# Altium PCB 8relay_breakout.PcbDoc
Units mm, origin at the board's own origin, x right, y up, seen from the top; angles counter-clockwise.
Board outline 91 x 31 mm, 2 copper layers (Top Layer, Bottom Layer); 14 components, 13 nets, 29 pads, 0 vias.
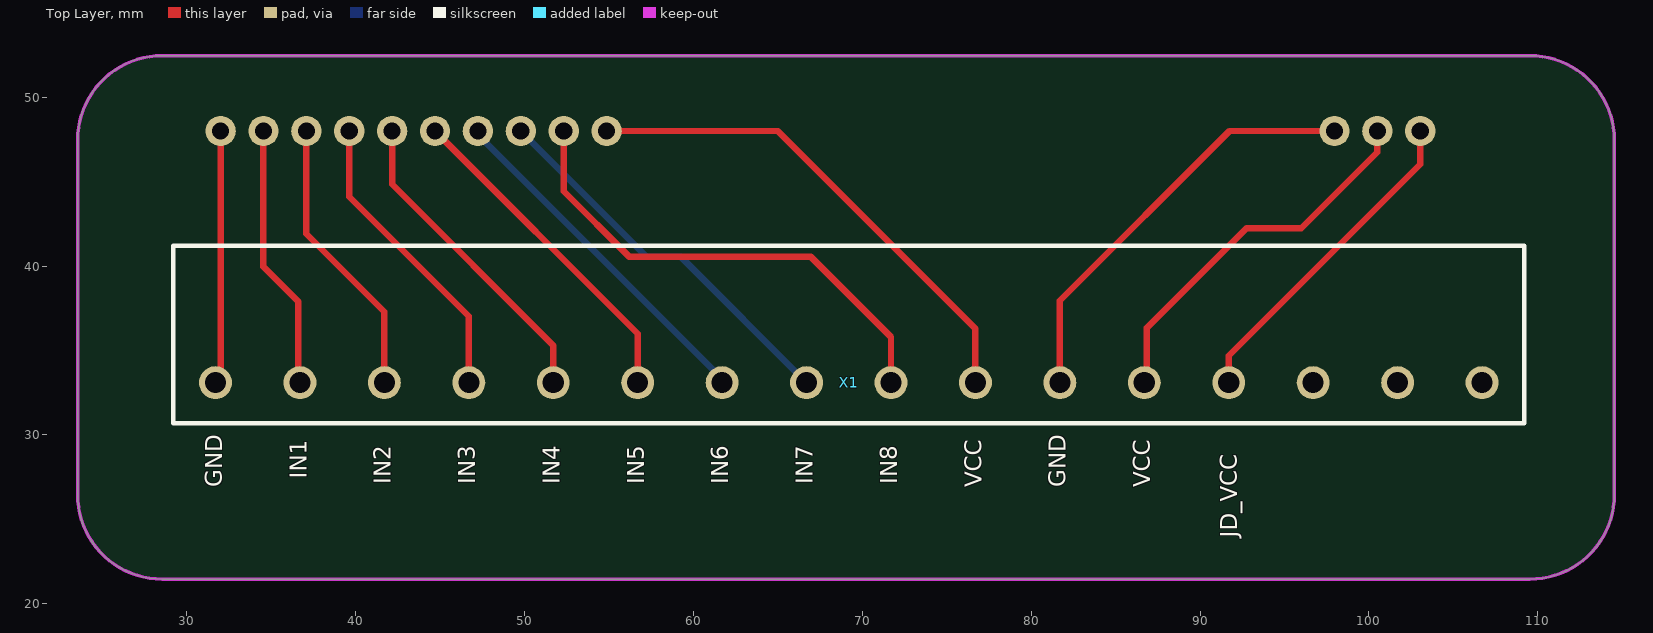
[diagram p0: Top Layer view]
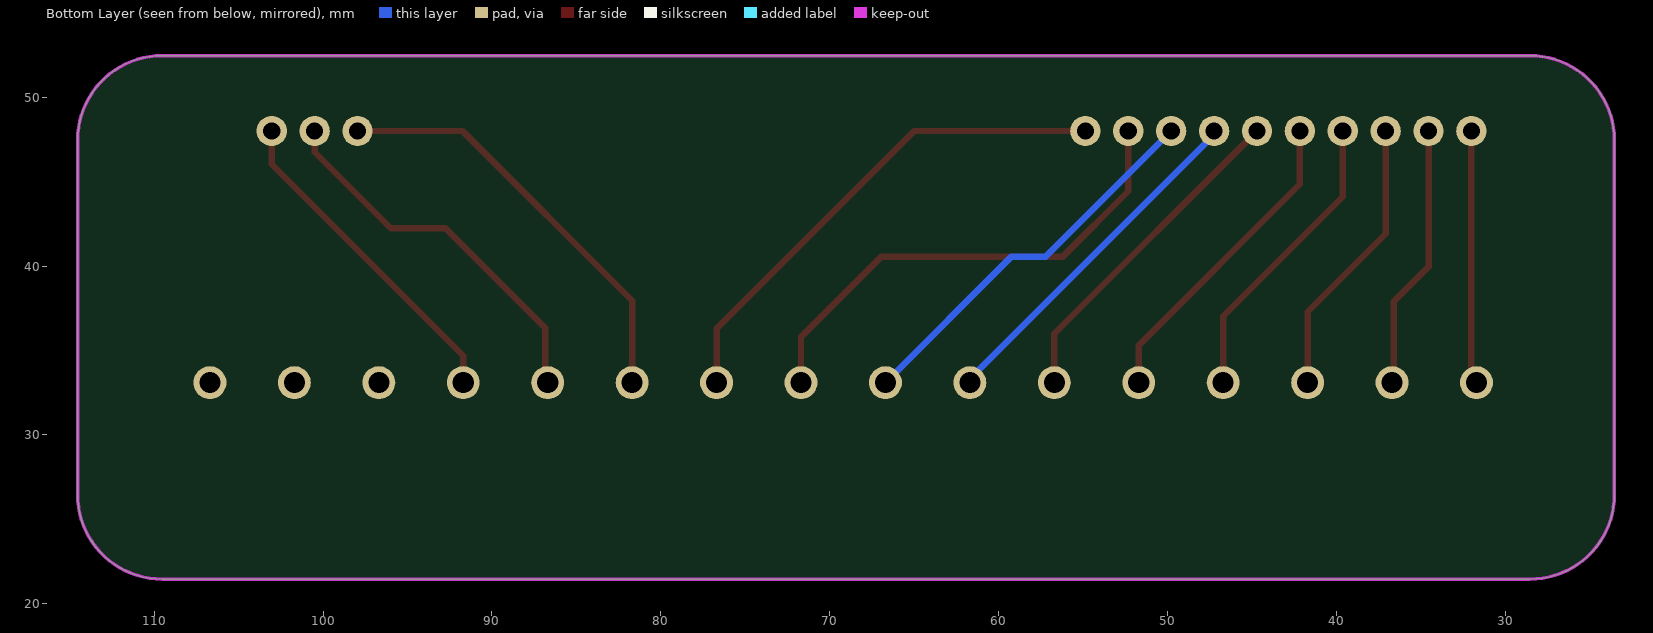
[diagram p1: Bottom Layer view, seen from below]

## Layer stack, top to bottom
Top Solder: solder mask 0.0102, Solder Resist, Dk 3.5
Top Layer: signal copper 0.0356
Dielectric 1: dielectric 0.32, FR-4, Dk 4.8
Bottom Layer: signal copper 0.0356
Bottom Solder: solder mask 0.0102, Solder Resist, Dk 3.5

## Board outline
23.536,47.464 23.536,26.464 ccw(c28.536,26.464) 28.536,21.464 109.536,21.464 ccw(c109.536,26.464) 114.536,26.464 114.536,47.464 ccw(c109.536,47.464) 109.536,52.464 28.536,52.464 ccw(c28.536,47.464)

## Design rules (kind name [scope] priority, off if disabled: settings)
BoardOutlineClearance [All] p1: gap=0.3 ignorepadtopadclearanceinfootprint=FALSE except(0.4: Arc-SplitBarrior Arc-SplitContinuation Track-SplitBarrior Track-SplitContinuation SMDPad-SplitBarrior SMDPad-SplitContinuation THPad-SplitBarrior THPad-SplitContinuation Via-SplitBarrior Via-SplitContinuation Fill-SplitBarrior Fill-SplitContinuation Poly-SplitBarrior Poly-SplitContinuation Region-SplitBarrior Region-SplitContinuation Text-SplitBarrior Text-SplitContinuation)
Clearance "Clearance Different Nets" [All] p1: gap=0.2 ignorepadtopadclearanceinfootprint=FALSE except(0.089: Arc-Arc Arc-Track Arc-SMDPad Track-Track Track-SMDPad; 0.127: SMDPad-SMDPad SMDPad-Via THPad-Via Via-Via; 0.254: Arc-Via Arc-Text Track-Via Track-Text SMDPad-Text THPad-Text Via-Text Fill-Text Poly-Text Region-Text Text-Text; 0.5: THPad-THPad Via-Hole)
Clearance "Clearance Same Nets" [All] p2: gap=0.2 ignorepadtopadclearanceinfootprint=FALSE except(0.089: Arc-Arc Arc-Track Arc-SMDPad Track-Track Track-SMDPad SMDPad-SMDPad; 0.127: SMDPad-Via THPad-Via; 0.254: Arc-Via Arc-Text Track-Via Track-Text SMDPad-Text THPad-Text Via-Via Via-Text Fill-Text Poly-Text Region-Text Text-Text)
Clearance "Clearance Bottom Layer" [OnLayer('Bottom Layer')] p3: gap=0.203 ignorepadtopadclearanceinfootprint=TRUE except(0.254: Arc-Text Track-Text SMDPad-Text THPad-Text Via-Text Fill-Text Poly-Text Region-Text Text-Text)
Clearance "Clearance Top Layer" [OnLayer('Top Layer')] p4: gap=0.203 ignorepadtopadclearanceinfootprint=TRUE except(0.254: Arc-Text Track-Text SMDPad-Text THPad-Text Via-Text Fill-Text Poly-Text Region-Text Text-Text)
HoleSize [All] p1: absolutevalues=TRUE maxlimit=6.3 minlimit=0.2 maxpercent=80.000 minpercent=20.000
MinimumAnnularRing [All] p1: minimumring=0.13
MinimumSolderMaskSliver [All] p1: minsoldermaskwidth=0.1
PolygonConnect PolygonConnect_1 [All] p1: thpad.connectstyle=Relief thpad.reliefconductorwidth=0.508 thpad.reliefentries=4 thpad.polygonreliefangle="90 Angle" thpad.airgapwidth=0.254 smdpad.connectstyle=Relief smdpad.reliefconductorwidth=0.508 smdpad.reliefentries=4 smdpad.polygonreliefangle="90 Angle" smdpad.airgapwidth=0.254 via.connectstyle=Direct via.reliefconductorwidth=0.508 via.reliefentries=4 via.polygonreliefangle="90 Angle" via.airgapwidth=0.254
RoutingCorners [All] p1: cornerstyle=Round minsetback=2.54 maxsetback=2.54
RoutingVias [All] p1: holewidth=0.5 width=1 viastyle="Through Hole" minholewidth=0.2 minwidth=0.35 maxholewidth=1 maxwidth=2
SilkToSilkClearance [All] p1: silktosilkclearance=0.1
SilkToSolderMaskClearance [IsPad] p1: minsilkscreentomaskgap=0.1 clearancetoexposedcopper=TRUE
SolderMaskExpansion [All] p1: expansion=0.102 istentingtop=FALSE
Width [All] p1: maxlimit=2.54 minlimit=0.089 preferedwidth=0.381
25 further rules are at their usual default settings.

## Classes and differential pairs
component class 8relay_breakout: GND IN1 IN2 IN3 IN4 IN5 IN6 IN7 IN8 JD_VCC VCC X1

## Components (designator, comment, footprint, x,y, rotation, side; value= is the part's Value field where it differs from the comment)
GND "GenericPinHeader(0.1in)" GenericPinHeader(.1in) 32,48 r0 top (schematic designator X4)
GND "GenericPinHeader(0.1in)" GenericPinHeader(.1in) 97.96,48 r0 top (schematic designator X2)
IN1 "GenericPinHeader(0.1in)" GenericPinHeader(.1in) 34.54,48 r0 top (schematic designator X5)
IN2 "GenericPinHeader(0.1in)" GenericPinHeader(.1in) 37.08,48 r0 top (schematic designator X6)
IN3 "GenericPinHeader(0.1in)" GenericPinHeader(.1in) 39.62,48 r0 top (schematic designator X7)
IN4 "GenericPinHeader(0.1in)" GenericPinHeader(.1in) 42.16,48 r0 top (schematic designator X8)
IN5 "GenericPinHeader(0.1in)" GenericPinHeader(.1in) 44.7,48 r0 top (schematic designator X9)
IN6 "GenericPinHeader(0.1in)" GenericPinHeader(.1in) 47.24,48 r0 top (schematic designator X10)
IN7 "GenericPinHeader(0.1in)" GenericPinHeader(.1in) 49.78,48 r0 top (schematic designator X11)
IN8 "GenericPinHeader(0.1in)" GenericPinHeader(.1in) 52.32,48 r0 top (schematic designator X12)
JD_VCC "GenericPinHeader(0.1in)" GenericPinHeader(.1in) 103.04,48 r0 top (schematic designator X13)
VCC "GenericPinHeader(0.1in)" GenericPinHeader(.1in) 100.5,48 r0 top (schematic designator X14)
VCC "GenericPinHeader(0.1in)" GenericPinHeader(.1in) 54.86,48 r0 top (schematic designator X3)
X1 "TERM BLOCK 16POS 45DEG 5MM PCB" PHEONIX-1988943 31.7,33.1 r90 top

## Footprints (in the part's own frame and the unit in brackets; to place one, negate y for a bottom-side part, rotate by r counter-clockwise, add the part's x,y. Pads: shape width x height; smd on the part's side, far side on the other; paste and mask are expansions set on the pad)
GenericPinHeader(.1in) [mm] "Generic .1in (2.54mm) pin header"
  round 1.8 hole 1.016: 1(0,0)
  body extent -1.27,-1.27 1.27,1.27, height 9.5
PHEONIX-1988943 [mm] "TERM BLOCK 16POS 45DEG 5MM PCB"
  round 1.95 hole 1.25: 1(0,0) 2(0,-5) 3(0,-10) 4(0,-15) 5(0,-20) 6(0,-25) 7(0,-30) 8(0,-35) 9(0,-40) 10(0,-45) 11(0,-50) 12(0,-55) 13(0,-60) 14(0,-65) 15(0,-70) 16(0,-75)
  silkscreen extent -2.4,-77.5 8.1,2.5

## Part data
GND GND IN1 IN2 IN3 IN4 IN5 IN6 IN7 IN8 JD_VCC VCC VCC: "Generic .1in(2.54mm) pitch pin header"
X1: library part PHEONIX-1988943, "16 Position Wire to Board Terminal Block 45° (135°) Angle with Board 0.197\" (5.00mm) Through Hole", ComponentLink1Description=DIGIKEY, ComponentLink1URL=https://www.digikey.com/en/products/detail/phoenix-contact/1988943/950906

## Nets (pads, with @x,y where several pads share a name; then routed paths per layer and width w, separated by ;. In a path a pad name is that pad's centre, name@x,y a point inside that pad or via, vN(x,y) a via of type N, cw(c..) or ccw(c..) an arc to the next point about the centre after c; other vN are vias at no path point)
GND: GND.1@97.96,48 X1.11 | length 25.3
  Top Layer w0.381: X1.11 81.7,37.95 91.75,48 GND.1@97.96,48
GND_LOOP: GND.1@32,48 X1.1 | length 15.2
  Top Layer w0.381: X1.1 32,33.1 GND.1@32,48
IN1: IN1.1 X1.2 | length 15.8
  Top Layer w0.381: IN1.1 34.54,39.96 36.61,37.89 36.61,33.19 X1.2
IN2: IN2.1 X1.3 | length 16.8
  Top Layer w0.381: IN2.1 37.08,41.92 41.7,37.3 X1.3
IN3: IN3.1 X1.4 | length 18
  Top Layer w0.381: IN3.1 39.62,44.11 46.7,37.03 X1.4 X1.4@46.563,33.237
IN4: IN4.1 X1.5 | length 18.9
  Top Layer w0.381: IN4.1 42.16,44.84 51.7,35.3 X1.5
IN5: IN5.1 X1.6 | length 19.9
  Top Layer w0.381: IN5.1 56.7,36 X1.6
IN6: IN6.1 X1.7 | length 20.9
  Bottom Layer w0.381: IN6.1 47.24,47.78 61.7,33.32 X1.7
IN7: IN7.1 X1.8 | length 23.1
  Bottom Layer w0.381: IN7.1 57.216,40.564 59.236,40.564 X1.8
IN8: IN8.1 X1.9 | length 29.2
  Top Layer w0.381: IN8.1 52.32,44.43 56.186,40.564 66.936,40.564 71.7,35.8 X1.9
JD_VCC: JD_VCC.1 X1.13 | length 19.6
  Top Layer w0.381: X1.13 91.7,34.7 103.04,46.04 JD_VCC.1
VCC: VCC.1@54.86,48 X1.10 | length 29.9
  Top Layer w0.381: VCC.1@54.86,48 65,48 76.7,36.3 X1.10
VCC_LOOP: VCC.1@100.5,48 X1.12 | length 22.5
  Top Layer w0.381: X1.12 86.854,33.254 86.854,36.354 92.75,42.25 96,42.25 100.5,46.75 VCC.1@100.5,48
pads on no net: X1.14 X1.15 X1.16

## Keep-outs
Keep-Out Layer:
  the board outline again, w0.2